# Altium PCB PCB_Urobo.pcbdoc
Units mm, origin at the board's own origin, x right, y up, seen from the top; angles counter-clockwise.
Board outline 93.09 x 64.74 mm, 2 copper layers (Top Layer, Bottom Layer); 53 components, 57 nets, 204 pads, 46 vias.
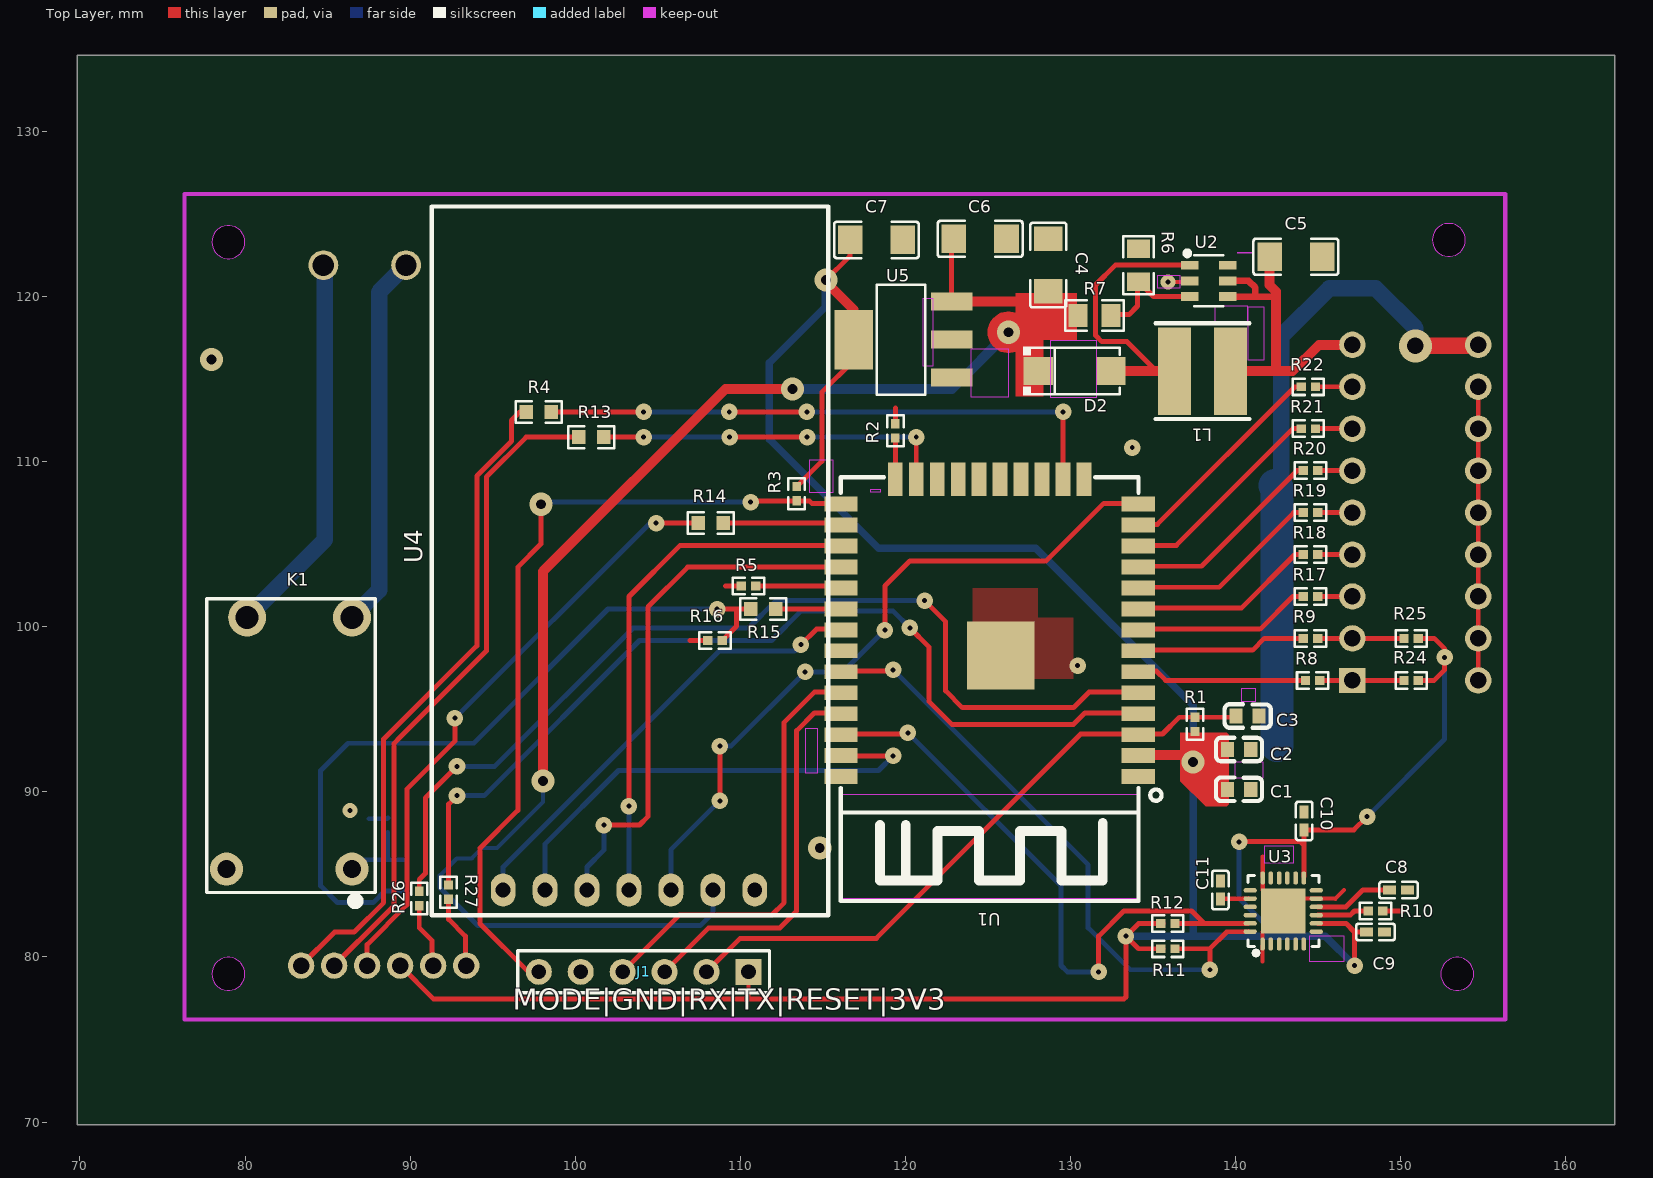
[diagram p0: Top Layer view]
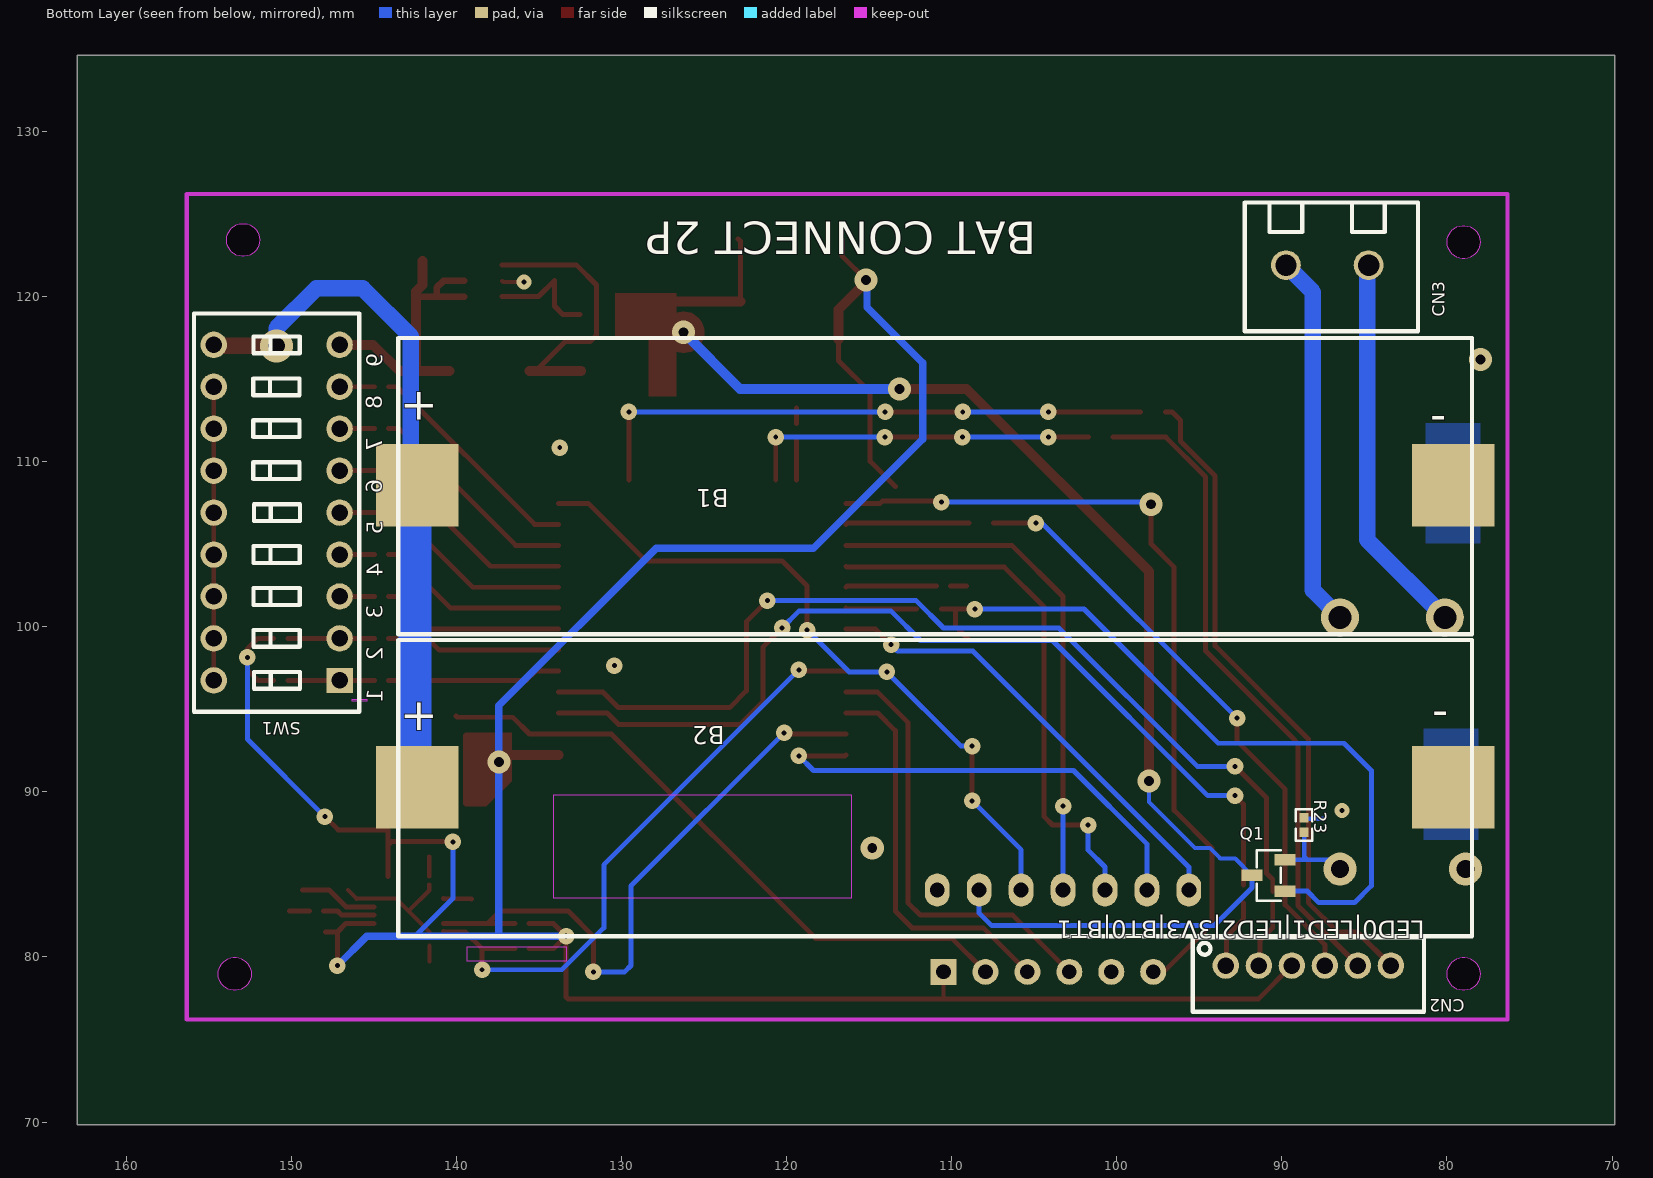
[diagram p1: Bottom Layer view, seen from below]

## Layer stack, top to bottom
Top Layer: signal copper (thickness not stored)
Dielectric: dielectric 0.32, FR-4, Dk 4.8
Bottom Layer: signal copper (thickness not stored)

## Board outline
162.941,69.85 69.85,69.85 69.85,134.595 162.941,134.595
cut-out: 154.416,78.969 ccw(c153.416,78.969) 152.416,78.969 ccw(c153.416,78.969)
cut-out: 153.908,123.419 ccw(c152.908,123.419) 151.908,123.419 ccw(c152.908,123.419)
cut-out: 79.994,123.292 ccw(c78.994,123.292) 77.994,123.292 ccw(c78.994,123.292)
cut-out: 79.994,78.969 ccw(c78.994,78.969) 77.994,78.969 ccw(c78.994,78.969)

## Components (designator, comment, footprint, x,y, rotation, side; value= is the part's Value field where it differs from the comment)
B1 "18650" 18650 123.698,105.766 r180 bottom
B2 "18650" 18650 123.698,87.478 r180 bottom
C1 "CL10A106MQ8NNNC" C0603 140.208,90.145 r0 top
C2 "0.1u" C0603 140.208,92.558 r0 top
C3 "1u" C0603 140.716,94.59 r180 top
C4 "1206X226M250NT" C1206 128.651,121.895 r270 top
C5 "1206X226M250NT" C1206 143.637,122.403 r180 top
C6 "1206X226M250NT" C1206 124.523,123.482 r180 top
C7 "1206X226M250NT" C1206 118.237,123.419 r180 top
C8 "FCC0402B104K250AT" C0402 149.86,84.049 r180 top
C9 "10nF" C0402 148.463,81.509 r0 top
C10 "FCC0402B104K250AT" C0402 144.145,88.24 r270 top
C11 "CC0402KRX7R6BB222" C0402 139.065,84.049 r90 top
CN2 "B6B-PH-K-S(LF)(SN)_C131342" CONN-TH_B6B-PH-K-S 88.392,79.477 r0 bottom
CN3 "MX126-5.0-02P-GN01-Cu-S-A" CONN-TH_2P-P5.00_MX126-5.0-GN01-02P-CU-S-A 87.249,121.895 r0 bottom
D2 "B340A-13-F" SMA_L4.4-W2.6-LS5.0-RD 130.238,115.481 r0 top
J1 "HDR-M-2.54_1x6" HDR-M-2.54_1X6 104.14,79.096 r180 top
K1 "HF32FA-G/005-HSL1" RELAY-TH_HF32FA-XX-HXX1X 82.677,92.939 r90 top
L1 "CDRH4D28NP-100NC" IND-SMD_L4.7-W4.7 137.986,115.481 r180 top
Q1 "BSS138P" SOT-23-3_L2.9-W1.3-P1.90-LS2.4-BR 90.805,84.938 r180 bottom
R1 "SCR0402F10K" R0402 137.541,94.082 r270 top
R2 "SCR0402F10K" R0402 119.38,111.862 r90 top
R3 "SCR0402F10K" R0402 113.411,108.052 r90 top
R4 "SCR0603F330R" R0603 97.79,113.005 r0 top
R5 "SCR0402F10K" R0402 110.49,102.464 r180 top
R6 "Res_0603" R0805 134.112,121.895 r270 top
R7 "Res_0603" R0805 131.445,118.847 r180 top
R8 "Res_0603" R0402 144.653,96.749 r0 top
R9 "Res_0603" R0402 144.526,99.289 r0 top
R10 "Res_0603" R0402 148.463,82.779 r0 top
R11 "Res_0603" R0402 135.89,80.493 r180 top
R12 "Res_0603" R0402 135.89,82.017 r180 top
R13 "SCR0603F330R" R0603 100.965,111.481 r180 top
R14 "SCR0603F330R" R0603 108.204,106.274 r180 top
R15 "SCR0603F330R" R0603 111.379,101.067 r180 top
R16 "Res_0603" R0402 108.458,99.162 r0 top
R17 "Res_0603" R0402 144.526,101.829 r0 top
R18 "Res_0603" R0402 144.526,104.369 r0 top
R19 "Res_0603" R0402 144.526,106.909 r0 top
R20 "Res_0603" R0402 144.526,109.449 r0 top
R21 "Res_0603" R0402 144.399,111.989 r0 top
R22 "Res_0603" R0402 144.399,114.529 r0 top
R23 "Res_0603" R0402 88.646,87.986 r270 bottom
R24 "SCR0402F10K" R0402 150.622,96.749 r0 top
R25 "SCR0402F10K" R0402 150.622,99.289 r0 top
R26 "SCR0402F10K" R0402 90.551,83.541 r270 top
R27 "SCR0402F10K" R0402 92.329,83.922 r270 top
SW1 "DS-09RP_C458083" SW-TH_18P-L24.4-W9.9-P2.54-LS7.6 150.876,106.909 r0 bottom
U1 "ESP32-WROOM-32-N4" WIFIM-SMD_ESP32-WROOM-32-N4 125.095,99.924 r180 top
U2 "MT3608" SOT-23-6_L2.9-W1.6-P0.95-LS2.8-BL 138.367,120.942 r270 top
U3 "MPU-6050" QFN-24_L4.0-W4.0-P0.50-BL-EP2.7 142.875,82.779 r0 top
U4 "E32170T30D" E32170T30 91.313,125.451 r90 top
U5 "AMS1117-3.3" SOT-223-3_L6.4-W3.5-P2.30-LS7.0-BR 119.825,117.386 r0 top

## Footprints (in the part's own frame and the unit in brackets; to place one, negate y for a bottom-side part, rotate by r counter-clockwise, add the part's x,y. Pads: shape width x height; smd on the part's side, far side on the other; paste and mask are expansions set on the pad)
18650 [mm]
  rect 5x5 smd: 1(-18.669,2.794) 2(44.069,2.794)
  silkscreen extent -19.81,-6.22 45.21,11.71
C0402 [mm]
  rect 0.79x0.54 smd: 1(-0.545,0) 2(0.545,0)
  silkscreen extent -1.17,-0.5 1.17,0.5
C0603 [mm]
  rect 0.8x0.9 smd: 1(-0.7,0) 2(0.7,0)
  silkscreen extent -1.41,-0.71 1.39,0.72
C1206 [mm]
  rect 1.485x1.728 smd: 1(-1.593,0) 2(1.593,0)
  silkscreen extent -2.56,-1.09 2.56,1.09
CONN-TH_2P-P5.00_MX126-5.0-GN01-02P-CU-S-A [mm]
  round 1.8 hole 1.3: 1(-2.5,0) 2(2.5,0)
  silkscreen extent -5.5,-3.8 5,4
CONN-TH_B6B-PH-K-S [mm]
  round 1.6 hole 1: 1(5,0) 2(3,0) 3(1,0) 4(-1,0) 5(-3,0) 6(-5,0)
  silkscreen extent -7,-1.7 7,2.8
E32170T30 [mm]
  oval 2x1.5 hole 0.9: 1(-41.402,-4.318) 2(-41.402,-6.858) 3(-41.402,-9.398) 4(-41.402,-11.938) 5(-41.402,-14.478) 6(-41.402,-17.018) 7(-41.402,-19.558)
  silkscreen extent -42.93,-24 0,0
HDR-M-2.54_1X6 [mil]
  rect 62x62 hole 35: 1(-250,0)
  round 62 hole 35: 2(-150,0) 3(-50,0) 4(50,0) 5(150,0) 6(250,0)
  silkscreen extent -300,-50 300,50
IND-SMD_L4.7-W4.7 [mm]
  rect 2x5.3 smd: 1(-1.7,0) 2(1.7,0)
  silkscreen extent -2.85,-2.9 2.85,2.9
QFN-24_L4.0-W4.0-P0.50-BL-EP2.7 [mm]
  oval 0.28x0.8 smd: 1(-1.25,-2) 2(-0.75,-2) 3(-0.25,-2) 4(0.25,-2) 5(0.75,-2) 6(1.25,-2) 13(1.25,2) 14(0.75,2) 15(0.25,2) 16(-0.25,2) 17(-0.75,2) 18(-1.242,2)
  oval 0.8x0.28 smd: 7(2,-1.25) 8(2,-0.75) 9(2,-0.25) 10(2,0.25) 11(2,0.75) 12(2,1.25) 19(-2,1.25) 20(-2,0.75) 21(-2,0.25) 22(-2,-0.25) 23(-2,-0.75) 24(-2,-1.25)
  rect 2.7x2.7 smd: 25(0.012,0)
  silkscreen extent -2.14,-2.79 2.16,2.15
R0402 [mm]
  rect 0.566x0.54 smd: 1(-0.433,0) 2(0.433,0)
  silkscreen extent -0.94,-0.5 0.94,0.5
R0603 [mm]
  rect 0.806x0.864 smd: 1(-0.753,0) 2(0.753,0)
  silkscreen extent -1.39,-0.66 1.39,0.66
R0805 [mm]
  rect 1.133x1.377 smd: 1(-1,0) 2(1,0)
  silkscreen extent -1.76,-0.92 1.76,0.92
RELAY-TH_HF32FA-XX-HXX1X [mm]
  round 2 hole 1.1: 1(-7.62,-3.8) 2(-7.62,3.8)
  round 2.3 hole 1.4: 3(7.62,2.55) 4(7.62,-3.8)
  silkscreen extent -9.8,-5.2 8.76,5
SMA_L4.4-W2.6-LS5.0-RD [mm]
  rect 1.8x1.7 smd: 1(-2.193,0) 2(2.193,0)
  silkscreen extent -3.11,-1.48 2.73,1.48
SOT-23-3_L2.9-W1.3-P1.90-LS2.4-BR [mm]
  rect 1.25x0.7 smd: 1(1,-0.95) 2(1,0.95) 3(-1,0)
  silkscreen extent -0.73,-1.53 0.73,1.53
SOT-23-6_L2.9-W1.6-P0.95-LS2.8-BL [mm]
  rect 0.532x1.072 smd: 1(-0.95,-1.149) 2(0,-1.149) 3(0.95,-1.149) 4(0.95,1.149) 5(0,1.149) 6(-0.95,1.149)
  silkscreen extent -1.82,-1.45 1.54,0.89
SOT-223-3_L6.4-W3.5-P2.30-LS7.0-BR [mm]
  rect 2.5x1.1 smd: 1(2.97,-2.3) 2(2.97,0) 3(2.97,2.3)
  rect 2.34x3.6 smd: 4(-2.97,0)
  silkscreen extent -1.57,-3.33 1.37,3.33
SW-TH_18P-L24.4-W9.9-P2.54-LS7.6 [mm]
  rect 1.6x1.524 hole 1: 1(-3.81,10.16)
  round 1.6 hole 1: 2(-3.81,7.62) 3(-3.81,5.08) 4(-3.81,2.54) 5(-3.81,0) 6(-3.81,-2.54) 7(-3.81,-5.08) 8(-3.81,-7.62) 9(-3.81,-10.16) 10(3.81,-10.16) 11(3.81,-7.62) 12(3.81,-5.08) 13(3.81,-2.54) 14(3.81,0) 15(3.81,2.54) 16(3.81,5.08) 17(3.81,7.62) 18(3.81,10.16)
  silkscreen extent -5,-12.06 5,12.06
WIFIM-SMD_ESP32-WROOM-32-N4 [mm]
  rect 2x0.9 smd: 1(-9,9.005) 2(-9,7.735) 3(-9,6.465) 4(-9,5.195) 5(-9,3.925) 6(-9,2.655) 7(-9,1.385) 8(-9,0.115) 9(-9,-1.155) 10(-9,-2.425) 11(-9,-3.695) 12(-9,-4.965) 13(-9,-6.235) 14(-9,-7.505) 25(9,-7.505) 26(9,-6.235) 27(9,-4.965) 28(9,-3.695) 29(9,-2.425) 30(9,-1.155) 31(9,0.115) 32(9,1.385) 33(9,2.655) 34(9,3.925) 35(9,5.195) 36(9,6.465) 37(9,7.735) 38(9,9.005)
  rect 0.9x2 smd: 15(-5.715,-9.005) 16(-4.445,-9.005) 17(-3.175,-9.005) 18(-1.905,-9.005) 19(-0.635,-9.005) 20(0.635,-9.005) 21(1.905,-9.005) 22(3.175,-9.005) 23(4.445,-9.005) 24(5.715,-9.005)
  rect 4.1x4.1 smd: 39(-0.68,1.665)
  silkscreen extent -10.41,-9.13 9.02,16.54

## Via types
v1: diameter 1, hole 0.3, Top Layer to Bottom Layer, 35 vias
v2: diameter 1.4, hole 0.6, Top Layer to Bottom Layer, 8 vias
v3: diameter 0.9, hole 0.3, Top Layer to Bottom Layer, 2 vias
v4: diameter 2, hole 1, Top Layer to Bottom Layer, 1 vias

## Nets (pads, with @x,y where several pads share a name; then routed paths per layer and width w, separated by ;. In a path a pad name is that pad's centre, name@x,y a point inside that pad or via, vN(x,y) a via of type N, cw(c..) or ccw(c..) an arc to the next point about the centre after c; other vN are vias at no path point)
3V3: C1.1 C2.1 C7.2 C9.1 C10.2 CN2.3 J1.1 R1.2 R3.2 R11.2 R12.2 R24.2 R25.2 U1.2 U3.8 U3.13 U5.4 | length 188.1
  Top Layer w0.254: J1.1 110.49,77.462 110.507,77.445
  Top Layer w0.3: CN2.3 91.424,77.445 110.507,77.445 133.223,77.445 133.35,77.572 v1(133.35,81.255) ; R3.2 114.935,110.008 114.935,114.199 116.854,116.119 U5.4 ; v2@115.126,120.942 116.644,122.461 C7.2 ; R11.2@135.584,80.493 134.112,80.493 v1(133.35,81.255) ; R12.2@135.584,82.017 134.112,82.017 v1(133.35,81.255) ; v1(140.208,86.97) 140.239,87 143.891,87 144.145,86.746 ; U3.13@144.125,84.879 144.145,84.899 144.145,86.746 ; U3.8@144.975,82.029 146.673,82.029 147.193,81.509 ; v1(147.193,79.477) 147.193,81.509 ; C9.1 147.193,81.509 ; v1(147.955,88.494) 147.156,87.695 C10.2 144.145,86.746 ; R24.2 152.019,96.749 152.654,97.384 v1(152.654,98.146) 152.654,98.654 152.019,99.289 R25.2
  Top Layer w0.6: v2@115.126,120.942 116.855,119.213 U5.4 ; U1.2@133.795,92.228 136.981,92.228 v2(137.414,91.796)
  Bottom Layer w0.3: v1(140.208,86.97) 140.208,83.541 142.494,81.255 ; v1(147.955,88.494) 152.654,93.193 v1(152.654,98.146)
  Bottom Layer w0.45: v2@115.126,120.942 115.126,119.355 111.76,115.989 111.76,111.354 118.364,104.75 127.889,104.75 137.414,95.225 v2(137.414,91.796) 137.414,81.255 ; v1(133.35,81.255) 137.414,81.255 ; v1(147.193,79.477) 145.415,81.255 142.494,81.255 137.414,81.255
  other v2: 115.189,121.006
5V: C4.2 C6.2 D2.1 Q1.3 R7.2 U4.6 U5.3 | length 84.6
  Top Layer w0.3: U5.3@122.794,119.686 122.794,123.346 C6.2
  Top Layer w0.6: v2(98.044,90.653) 98.044,103.353 109.093,114.402 v2(113.157,114.402) ; U5.3@122.794,119.686 127.303,119.686 127.317,119.672
  Bottom Layer w0.254: Q1.3 92.821,85.954 93.726,85.954 94.361,86.589 95.25,86.589 98.044,89.383 v2(98.044,90.653)
  Bottom Layer w0.3: Q1.3 91.805,84.192 94.107,81.89 107.569,81.89 108.331,82.652 U4.6
  Bottom Layer w0.6: v2(113.157,114.402) 122.809,114.402 v2(126.238,117.831)
$1N129: R2.1 U1.24 | length 2.5
  Top Layer w0.3: U1.24@119.38,108.889 R2.1
$1N167: R5.1 U1.29 | length 5.5
  Top Layer w0.3: R5.1 116.32,102.464 U1.29@116.395,102.388
$1N266: C8.2 U3.10 | length 4.8
  Top Layer w0.3: U3.10@144.976,83.028 146.68,83.028 147.701,84.049 C8.2
$1N317: C11.1 U3.20 | length 1.7
  Top Layer w0.3: C11.1 U3.20@140.774,83.528
$1N451: R22.2 SW1.8 | length 2.1
  Top Layer w0.3: R22.2@144.958,114.529 SW1.8
$1N452: R21.2 SW1.7 | length 2.1
  Top Layer w0.3: R21.2@144.959,111.989 SW1.7
$1N453: R20.2 SW1.6 | length 2.1
  Top Layer w0.3: R20.2 SW1.6
$1N454: R19.2 SW1.5 | length 2.1
  Top Layer w0.3: R19.2 SW1.5
$1N455: R18.2 SW1.4 | length 2.1
  Top Layer w0.3: R18.2 SW1.4
$1N456: R17.2 SW1.3 | length 2.1
  Top Layer w0.3: R17.2 SW1.3
$1N458: R8.2 R24.1 SW1.1 | length 5.2
  Top Layer w0.3: R8.2@144.959,96.749 SW1.1 R24.1
$1N702: R14.1 U1.26 | length 7.5
  Top Layer w0.3: R14.1 116.32,106.274 U1.26@116.395,106.198
$1N705: CN3.1 K1.3 | length 23.3
  Bottom Layer w1: K1.3 84.836,105.268 84.836,121.808 CN3.1
$1N707: CN3.2 K1.4 | length 22.7
  Bottom Layer w1: K1.4 88.122,102.204 88.122,120.268 CN3.2
$1N729: K1.1 Q1.2 R23.2 | length 5.3
  Bottom Layer w0.254: K1.1 87.046,85.888 88.46,85.888 ; R23.2 88.646,86.073 88.46,85.888 ; Q1.2 88.46,85.888
$1N762: Q1.1 R15.2 R16.2 | length 45.3
  Top Layer w0.3: v1(108.585,101.067) 109.771,101.067 ; R16.2 109.771,100.042 109.771,101.067 ; R15.2 109.771,101.067
  Bottom Layer w0.3: Q1.1 88.458,83.988 87.757,83.287 85.598,83.287 84.582,84.303 84.582,91.288 86.233,92.939 93.853,92.939 101.981,101.067 v1(108.585,101.067)
$1N769: R13.1 U1.23 | length 21.5
  Top Layer w0.3: R13.1 v1(104.14,111.481) ; v1(109.347,111.481) v1(114.046,111.481) ; U1.23@120.65,108.889 v1(120.65,111.481)
  Bottom Layer w0.3: v1(104.14,111.481) v1(109.347,111.481) ; v1(114.046,111.481) v1(120.65,111.481)
$1N770: R4.2 U1.16 | length 35.1
  Top Layer w0.3: R4.2 v1(104.14,113.005) ; v1(109.326,113.005) v1(114.028,113.005) ; U1.16@129.54,108.889 v1(129.54,113.005)
  Bottom Layer w0.3: v1(104.14,113.005) v1(109.326,113.005) ; v1(114.028,113.005) v1(129.54,113.005)
$1N1398: R9.2 R25.1 SW1.2 | length 5.2
  Top Layer w0.3: R9.2 SW1.2 R25.1
$1N23937: CN2.1 R27.2 | length 4.2
  Top Layer w0.3: R27.2@92.329,83.267 92.329,82.271 93.345,81.255 93.345,79.524 CN2.1
$1N23941: CN2.2 R26.2 | length 4.1
  Top Layer w0.3: R26.2@90.551,83.235 90.551,81.763 91.313,81.001 91.313,79.556 CN2.2
$2N131: R6.2 R7.1 U2.3 | length 6.9
  Top Layer w0.3: R7.1@132.508,118.91 133.541,118.91 134.048,119.418 134.048,120.958 135.015,119.992 U2.3
$2N132: D2.2 L1.2 U2.1 | length 17
  Top Layer w0.3: 135.191,115.481 133.413,117.259 131.889,117.259 131.508,117.64 131.508,120.688 132.712,121.892 U2.1
  Top Layer w0.6: D2.2 135.191,115.481 L1.2@135.561,115.481
AD0: R10.1 U3.9 | length 3.2
  Top Layer w0.3: U3.9@144.975,82.529 146.939,82.525 147.193,82.779 R10.1
AUX: U1.14 U4.5 | length 42.6
  Top Layer w0.3: v1(108.755,89.45) v1(108.755,92.763) ; v1(118.745,99.797) 118.745,102.464 120.269,103.988 128.524,103.988 132.005,107.468 U1.14@133.795,107.468
  Bottom Layer w0.3: U4.5 105.791,86.487 v1(108.755,89.45) ; v1(108.755,92.763) 109.426,92.763 v1(113.919,97.257) 116.205,97.257 v1(118.745,99.797)
BOT0: R26.1 U1.5 | length 59.2
  Top Layer w0.3: R26.1 90.551,84.684 90.932,85.065 90.932,89.637 91.567,90.272 v1(92.837,91.542) ; v1(121.158,101.575) 122.428,100.305 122.428,96.114 123.444,95.098 130.175,95.098 131.116,96.038 U1.5@133.795,96.038
  Bottom Layer w0.3: v1(92.837,91.542) 95.123,91.542 103.505,99.924 110.49,99.924 112.141,101.575 v1(121.158,101.575)
BOT1: R27.1 U1.4 | length 56.3
  Top Layer w0.3: R27.1 92.329,89.256 v1(92.837,89.764) ; v1(120.269,99.924) 121.412,98.781 121.412,95.479 122.809,94.082 130.175,94.082 130.862,94.768 U1.4@133.795,94.768
  Bottom Layer w0.3: v1(92.837,89.764) 94.488,89.764 103.886,99.162 111.887,99.162 113.665,100.94 119.253,100.94 v1(120.269,99.924)
DIP0: R8.1 U1.6 | length 10.5
  Top Layer w0.3: U1.6@133.795,97.309 135.196,97.309 135.756,96.749 R8.1@144.093,96.749
DIP1: R9.1 U1.7 | length 10.6
  Top Layer w0.3: U1.7@133.795,98.578 141.022,98.578 141.732,99.289 R9.1
DIP2: R17.1 U1.8 | length 11.1
  Top Layer w0.3: U1.8@133.795,99.848 141.478,99.848 143.458,101.829 R17.1
DIP3: R18.1 U1.9 | length 11.6
  Top Layer w0.3: U1.9@133.795,101.118 140.335,101.118 143.585,104.369 R18.1
DIP4: R19.1 U1.10 | length 12.2
  Top Layer w0.3: U1.10@133.795,102.388 138.99,102.388 143.51,106.909 R19.1
DIP5: R20.1 U1.11 | length 12.7
  Top Layer w0.3: U1.11@133.795,103.658 137.922,103.658 143.712,109.449 R20.1
DIP6: R21.1 U1.12 | length 13.2
  Top Layer w0.3: U1.12@133.795,104.928 136.398,104.928 143.458,111.989 R21.1@144.093,111.989
DIP7: R22.1 U1.13 | length 13.7
  Top Layer w0.3: U1.13@133.795,106.198 135.255,106.198 143.585,114.529 R22.1@144.093,114.529
GND: B1.2 B2.2 C1.2 C2.2 C3.1 C4.1 C5.1 C6.1 C7.1 C8.1 C9.2 C10.1 C11.2 J1.5 K1.2 R2.2 R5.2 R6.1 R10.2 R16.1 R23.1 SW1.11 SW1.12 SW1.13 SW1.14 SW1.15 SW1.16 SW1.17 SW1.18 U1.1 U1.15 U1.38 U1.39 U2.2 U3.1 U3.11 U3.18 U3.25 U4.7 U5.1 | length 35.1
  Top Layer w0.254: v3(135.89,120.879) 137.154,120.879 U2.2 ; 141.625,79.731 U3.1@141.625,80.679 ; U3.1@141.625,81.178 141.625,81.516 U3.25 ; U3.18@141.633,84.379 141.633,84.033 U3.25 ; U3.18@141.633,84.879 141.633,86.081 ; 146.558,84.049 146.037,83.528 U3.11 143.638,83.529 U3.25 ; SW1.18 SW1.17 SW1.16 SW1.15 SW1.14 SW1.13 SW1.12 SW1.11
  Top Layer w0.3: 106.934,99.162 R16.1 ; 109.093,102.464 R5.2 ; R2.2 119.38,113.259 ; R10.2 150.114,82.779
  Bottom Layer w0.3: 87.503,88.367 88.594,88.367 R23.1
  other v1: 130.429,97.638 133.731,110.846
  other v2: 114.808,86.589 77.978,116.18
  other v3: 86.36,88.875
LED0: CN2.6 R4.1 | length 40.1
  Top Layer w0.3: CN2.6 85.424,81.509 86.614,81.509 88.392,83.287 88.392,84.43 88.392,93.197 94.036,98.841 94.036,109.128 96.139,111.231 96.139,112.497 96.647,113.005 R4.1
LED1: CN2.5 R13.2 | length 40
  Top Layer w0.3: CN2.5 88.392,82.477 89.027,83.112 89.027,83.668 89.027,92.939 89.408,93.32 94.615,98.527 94.615,109.068 97.028,111.481 R13.2
LED2: CN2.4 R14.2 | length 36.8
  Top Layer w0.3: CN2.4 87.392,80.747 89.802,83.157 89.802,90.158 92.71,93.066 v1(92.71,94.463) ; v1(104.902,106.274) R14.2
  Bottom Layer w0.3: v1(92.71,94.463) 104.521,106.274 v1(104.902,106.274)
M0: U1.31 U4.1 | length 28.1
  Top Layer w0.3: v1(113.665,98.908) 114.606,99.848 U1.31@116.395,99.848
  Bottom Layer w0.3: U4.1 95.631,85.446 108.712,98.527 113.284,98.527 v1(113.665,98.908)
M1: U1.37 U4.2 | length 29
  Top Layer w0.3: U1.37@116.395,92.228 116.447,92.177 v1(119.253,92.177)
  Bottom Layer w0.3: U4.2 98.171,86.843 102.616,91.288 118.364,91.288 v1(119.253,92.177)
MODE: J1.6 R3.1 U1.25 | length 50.3
  Top Layer w0.3: J1.6 97.155,79.096 94.234,82.017 94.234,86.589 96.52,88.875 96.52,103.607 97.917,105.004 v2(97.917,107.417) ; v1(110.617,107.544) 110.692,107.619 R3.1 114.173,107.619 114.323,107.468 U1.25@116.395,107.468
  Bottom Layer w0.3: v2(97.917,107.417) 98.044,107.544 v1(110.617,107.544)
RELE: R15.1 U1.30 | length 4.3
  Top Layer w0.3: R15.1 116.343,101.067 U1.30@116.395,101.118
RESET: C3.2 J1.2 R1.1 U1.3 | length 38.5
  Top Layer w0.3: J1.2 109.982,81.128 118.237,81.128 130.608,93.498 135.561,93.498 136.577,94.514 R1.1 139.941,94.514 C3.2
RX: J1.4 U1.34 | length 26.9
  Top Layer w0.3: J1.4 106.299,82.525 111.887,82.525 112.649,83.287 112.649,94.209 114.479,96.038 U1.34@116.395,96.038
RX2: U1.27 U4.4 | length 32.2
  Top Layer w0.3: v1(103.251,89.129) 103.251,101.829 106.351,104.928 U1.27@116.395,104.928
  Bottom Layer w0.3: U4.4 v1(103.251,89.129)
SCL: R12.1 U1.36 U3.23 | length 38
  Top Layer w0.3: U1.36@116.395,93.498 120.067,93.498 v1(120.142,93.574) ; v1(131.699,79.096) 131.699,81.255 133.223,82.779 137.331,82.779 138.089,82.021 ; R12.1@136.449,82.017 U3.23@140.774,82.029
  Bottom Layer w0.3: v1(120.142,93.574) 129.413,84.303 129.413,79.477 129.794,79.096 v1(131.699,79.096)
SDA: R11.1 U1.33 U3.24 | length 37.8
  Top Layer w0.3: U1.33@116.395,97.308 119.178,97.308 v1(119.253,97.384) ; R11.1@136.449,80.493 138.43,80.493 ; v1(138.43,79.223) 138.43,80.493 ; U3.24@140.774,81.529 139.446,81.509 138.43,80.493
  Bottom Layer w0.3: v1(119.253,97.384) 131.064,85.573 131.064,81.763 133.604,79.223 v1(138.43,79.223)
TX: J1.3 U1.35 | length 23.9
  Top Layer w0.3: J1.3 108.077,81.763 112.395,81.763 113.411,82.779 113.411,93.701 114.479,94.768 U1.35@116.395,94.768
TX2: U1.28 U4.3 | length 33
  Top Layer w0.3: v1(101.727,87.986) 103.886,87.986 104.394,88.494 104.394,101.194 106.807,103.607 116.343,103.607 U1.28@116.395,103.658
  Bottom Layer w0.3: U4.3 100.711,85.446 101.727,86.462 v1(101.727,87.986)
VBAT: B1.1 B2.1 SW1.10 | length 40.2
  Top Layer w1: v4(150.876,117.005) 154.623,117.005 SW1.10
  Bottom Layer w1: B1.1 142.748,108.941 142.748,117.577 145.669,120.498 148.463,120.498 150.876,118.085 v4(150.876,117.005)
  Bottom Layer w2: B1.1 142.494,108.433 142.494,92.812
VCC: C5.2 L1.1 SW1.9 U2.4 U2.5 | length 19.5
  Top Layer w0.4: U2.4 141.186,119.985 ; U2.5 140.779,120.942 141.186,120.535 141.186,119.985 ; 142.43,119.98 141.186,119.985
  Top Layer w0.6: L1.1@140.41,115.481 142.303,115.481 ; C5.2@142.049,122.147 142.049,120.688 142.43,120.307 142.43,119.98 142.43,115.608 142.303,115.481 ; SW1.9 145.034,117.069 143.446,115.481 142.303,115.481
XCL: U3.7
XDA: U3.6
"": U1.17 U1.18 U1.19 U1.20 U1.21 U1.22 U1.32 U2.6 U3.2 U3.3 U3.4 U3.5 U3.12 U3.14 U3.15 U3.16 U3.17 U3.19 U3.21 U3.22 U5.2

## Polygon pours and split planes (outlines as drawn)
GND on Top Layer (solid, remove dead copper, pour order 0): 76.2,76.302 76.2,126.467 156.21,126.467 156.21,76.683 155.956,76.429 76.327,76.429
GND on Bottom Layer (solid, remove dead copper, pour order 1): 156.591,76.683 156.337,76.429 76.454,76.429 76.2,76.683 76.2,126.721 79.121,126.34 91.313,126.467 104.013,126.34 106.807,126.467 156.21,126.467 156.591,126.086

## Keep-outs
Top Layer:
  region net "": 123.952,113.937 126.238,113.937 126.238,116.815 123.952,116.815
  region net "": 135.255,120.528 136.643,120.528 136.643,121.26 135.255,121.26
  region net "": 140.716,116.18 141.732,116.18 141.732,119.355 140.716,119.355
  region net "": 138.715,118.465 140.716,118.465 140.716,119.402 138.715,119.402
  region net "": 141.732,85.7 143.51,85.7 143.51,86.716 141.732,86.716
  region net "": 144.466,79.731 146.558,79.731 146.558,81.255 144.466,81.255
  region net "": 114.173,108.15 115.612,108.15 115.612,110.084 114.173,110.084
  region net "": 113.919,91.161 114.681,91.161 114.681,93.828 113.919,93.828
  region net "": 140.335,95.479 141.224,95.479 141.224,96.241 140.335,96.241
  region net "": 140.081,122.654 140.97,122.654 140.97,122.657 140.081,122.657
  region net "": 128.778,113.894 131.572,113.894 131.572,117.323 128.778,117.323
  region net "": 139.954,90.854 141.669,90.854 141.669,91.796 139.954,91.796
  region net "": 117.856,108.179 118.491,108.179 118.491,108.306 117.856,108.306
  region net "": 121.031,115.799 121.666,115.799 121.666,119.863 121.031,119.863
Bottom Layer:
  region net "": 133.35,79.73 139.319,79.73 139.319,80.613 133.35,80.613
  region net "": 145.415,95.479 146.304,95.479 146.304,95.606 145.415,95.606
Board Outline Layer:
  lines w0.254 net "": 76.327,76.213 76.327,126.213 156.327,126.213 156.327,76.213 76.327,76.213
Multi-Layer:
  region net "": 154.416,78.969 ccw(c153.416,78.969) 152.416,78.969 ccw(c153.416,78.969)
  region net "": 153.908,123.419 ccw(c152.908,123.419) 151.908,123.419 ccw(c152.908,123.419)
  region net "": 79.994,123.292 ccw(c78.994,123.292) 77.994,123.292 ccw(c78.994,123.292)
  region net "": 79.994,78.969 ccw(c78.994,78.969) 77.994,78.969 ccw(c78.994,78.969)
  region net "": 116.078,83.538 134.095,83.538 134.095,89.815 116.078,89.815

## Other copper
Top Layer:
  region net 5V: 127.495,117.831 ccw(c126.238,117.831) 124.981,117.831 ccw(c126.238,117.831)
  region net 3V3: 136.652,93.574 139.446,93.574 139.573,93.447 139.573,89.256 139.446,89.129 138.176,89.129 136.652,90.653
  region net 5V: 126.682,120.18 126.682,117.386 126.682,113.957 128.333,113.957 128.333,117.386 130.365,117.386 130.365,120.18

## Silkscreen, mask and mechanical layers (free items; w line width, h text height)
Top Silkscreen Layer:
  text "MODE|GND|RX|TX|RESET|3V3" at 96.207,76.791 h1.28
Bottom Silkscreen Layer:
  text "BAT CONNECT 2P" at 104.883,124.52 h1.98 r180
  text "+" at 143.383,112.531 h1.99
  text "-" at 81.026,111.896 h1.99
  text "-" at 80.899,93.989 h1.99
  text "+" at 143.383,93.735 h1.99
  text "LED0|LED1|LED2|3V3|BT0|BT1" at 81.345,82.201 h1.06 r180
Top Solder Mask Layer:
  lines w0.254 net "": 76.327,76.2 156.058,76.2 156.058,126.086 76.327,126.086 76.327,76.2
Mechanical Layer:
  circle w0.025 net "": c153.416,78.969 r1
  circle w0.025 net "": c152.908,123.419 r1
  circle w0.025 net "": c78.994,123.292 r1
  circle w0.025 net "": c78.994,78.969 r1

## Text inside footprints (layer, text, board x,y; h text height)
SW1: Bottom Silkscreen Layer "1" at 144.443,96.241 h0.98 r270; Bottom Silkscreen Layer "2" at 144.463,98.781 h0.98 r270; Bottom Silkscreen Layer "3" at 144.463,101.321 h0.98 r270; Bottom Silkscreen Layer "4" at 144.463,103.861 h0.98 r270; Bottom Silkscreen Layer "5" at 144.463,106.401 h0.98 r270; Bottom Silkscreen Layer "6" at 144.483,108.941 h0.98 r270; Bottom Silkscreen Layer "7" at 144.483,111.481 h0.98 r270; Bottom Silkscreen Layer "8" at 144.483,114.021 h0.98 r270; Bottom Silkscreen Layer "9" at 144.463,116.561 h0.98 r270